# Altium PCB PCB1.PcbDoc
Units mm, origin at the board's own origin, x right, y up, seen from the top; angles counter-clockwise.
Board outline 100 x 50 mm, 2 copper layers (Top Layer, Bottom Layer); 19 components, 17 nets, 118 pads, 0 vias.
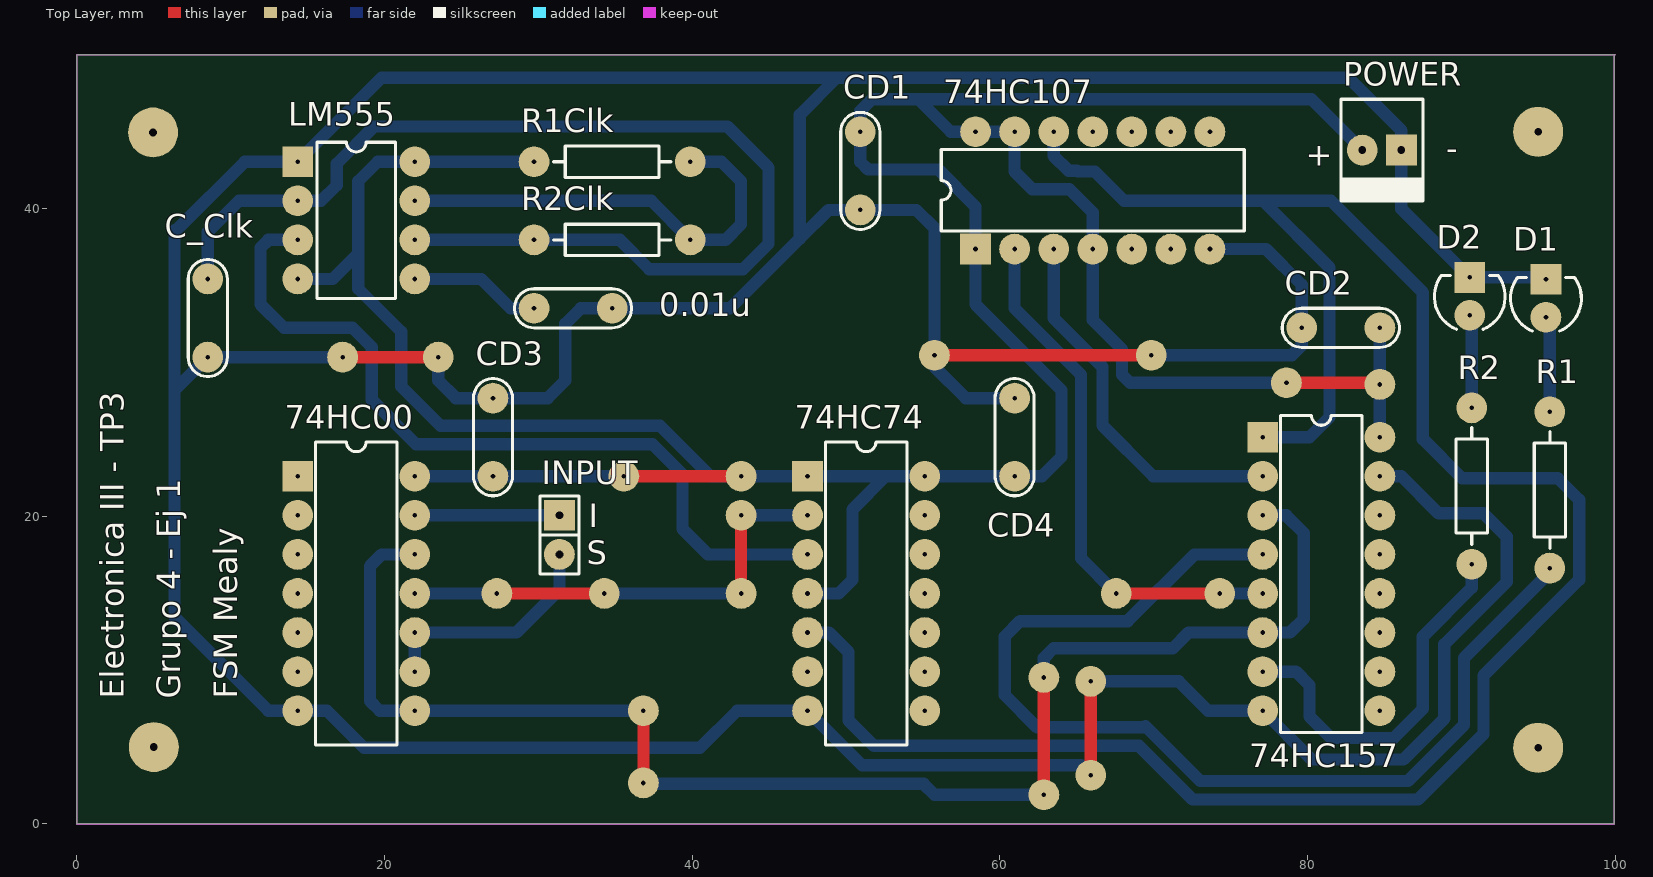
[diagram p0: Top Layer view]
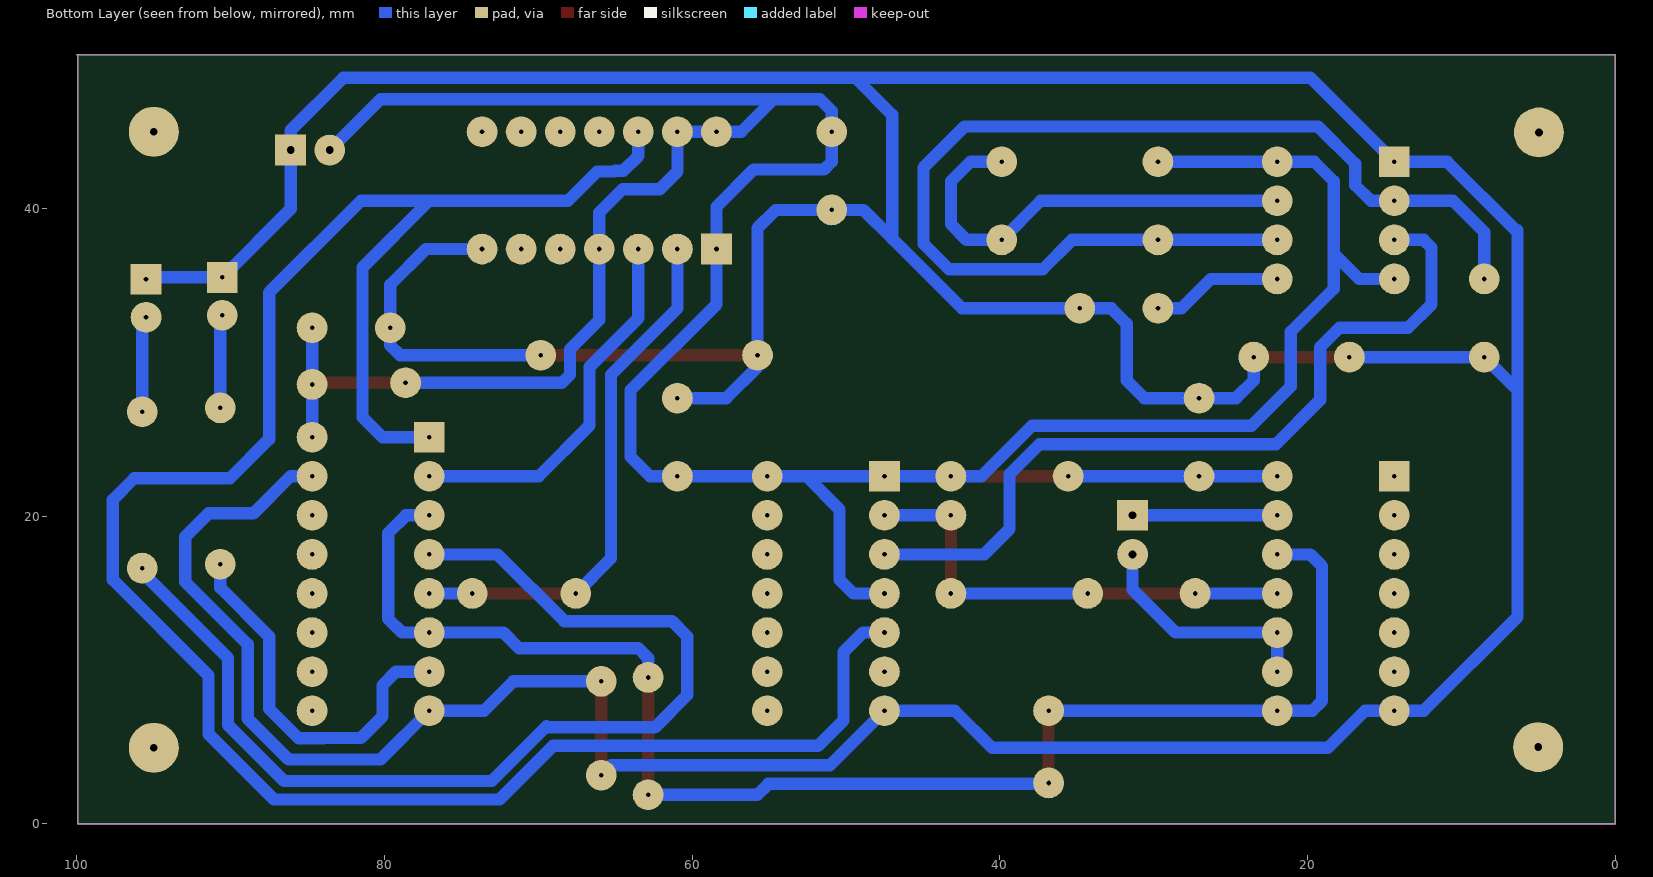
[diagram p1: Bottom Layer view, seen from below]
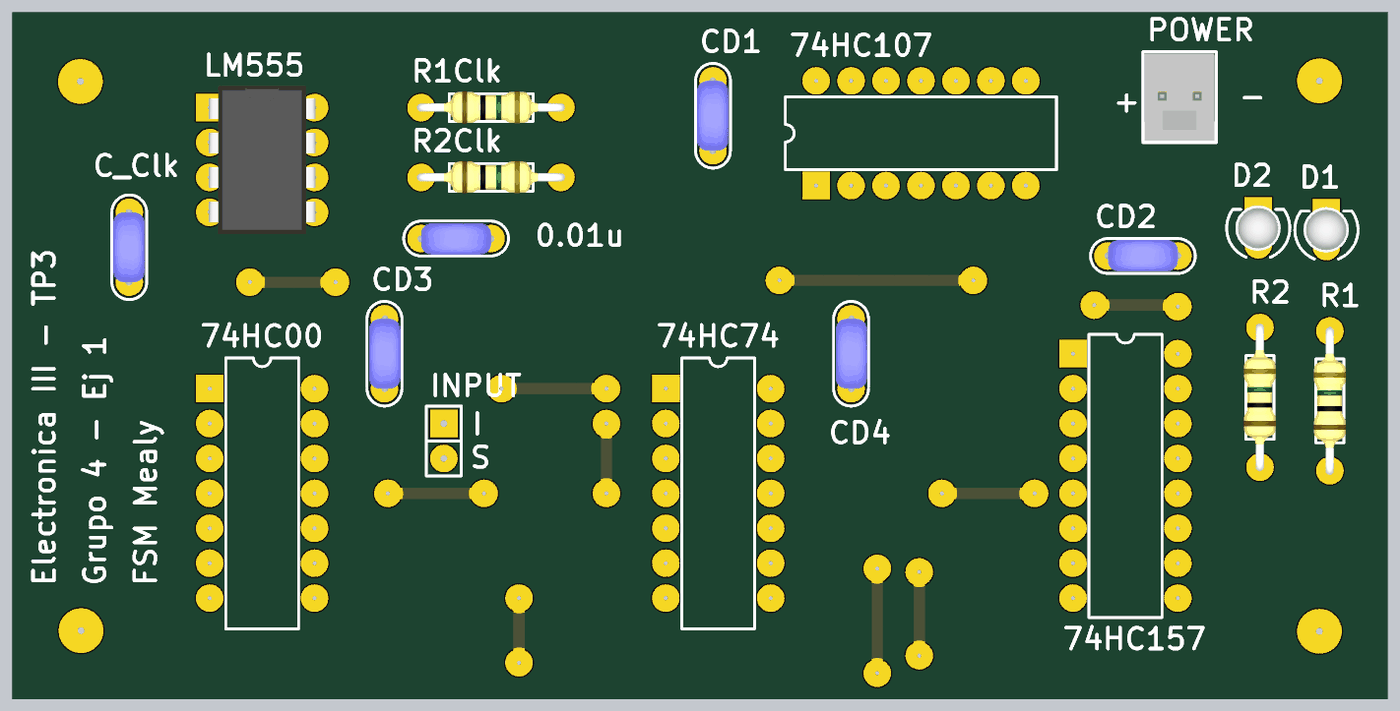
[diagram p2: 3D render of the assembled board from above, using the file's embedded part models]

## Layer stack, top to bottom
Top Solder: solder mask 0.0102, Solder Resist, Dk 3.5
Top Layer: signal copper 0.0356
Dielectric 1: dielectric 0.32, FR-4, Dk 4.8
Bottom Layer: signal copper 0.0356
Bottom Solder: solder mask 0.0102, Solder Resist, Dk 3.5

## Board outline
0,0 99.949,0 99.949,49.949 100,50 0,50

## Design rules (kind name [scope] priority, off if disabled: settings)
Clearance [All] p1: gap=0.4 ignorepadtopadclearanceinfootprint=FALSE
PolygonConnect [All] p1: connectstyle=Relief reliefconductorwidth=0.254 reliefentries=4 polygonreliefangle="90 Angle" airgapwidth=0.254
RoutingVias [All] p1: holewidth=0.3 width=2 viastyle="Through Hole" minholewidth=0.3 minwidth=1.5 maxholewidth=0.5 maxwidth=2
SolderMaskExpansion [All] p1: expansion=0.102
Width [All] p1: maxlimit=0.9 minlimit=0.6 preferedwidth=0.8
30 further rules are at their usual default settings.

## Components (designator, comment, footprint, x,y, rotation, side; value= is the part's Value field where it differs from the comment)
0.01u "CAP" CAP200 32.258,33.528 r0 top
74HC00 "SN74AHC00N" N014 18.161,14.986 r270 top
74HC74 "SN74AHCT74N" N014 51.308,14.986 r270 top
74HC107 "SN74HC107N" N014D 66.04,41.19 r0 top
74HC157 "SN54HC157J" J016 80.899,16.256 r270 top
C_Clk "CAP" CAP200 8.509,32.893 r270 top
CD1 "CAP" CAP200 50.927,42.46 r270 top
CD2 "CAP" CAP200 82.169,32.258 r180 top
CD3 "CAP" CAP200 27.051,25.146 r90 top
CD4 "CAP" CAP200 60.96,25.146 r90 top
D1 "LED" LED3 95.504,34.163 r90 top
D2 "LED" LED3 90.551,34.29 r90 top
INPUT "CON2" SIP2 31.369,18.796 r270 top
LM555 "LM555" DIP8 14.351,43.053 r0 top
POWER "MOLEX2" MOLEX2 86.106,43.815 r180 top
R1 "RES" RES400 95.758,16.637 r90 top
R1Clk "RES" RES400 29.718,43.053 r0 top
R2 "RES" RES400 90.678,16.891 r90 top
R2Clk "RES" RES400 29.718,37.973 r0 top

## Footprints (in the part's own frame and the unit in brackets; to place one, negate y for a bottom-side part, rotate by r counter-clockwise, add the part's x,y. Pads: shape width x height; smd on the part's side, far side on the other; paste and mask are expansions set on the pad)
CAP200 [mm]
  round 2 hole 0.3: 1(-2.54,0) 2(2.54,0)
  silkscreen extent -3.81,-1.27 3.81,1.27, body extent -2.79,-1.17 2.79,1.12, height 6.24
DIP8 [mm]
  rect 2x2 hole 0.3: 1(0,0)
  round 2 hole 0.3: 2(0,-2.54) 3(0,-5.08) 4(0,-7.62) 5(7.62,-7.62) 6(7.62,-5.08) 7(7.62,-2.54) 8(7.62,0)
  silkscreen extent 1.27,-8.89 6.35,1.27, body extent -0.06,-9.21 7.7,1.59, height 4.5
J016 [mm] "DIP; 16 Leads; Row Spacing 7.62 mm; Pitch 2.54 mm"
  rect 2x2 hole 0.3: 1(-8.89,-3.81)
  round 2 hole 0.3: 2(-6.35,-3.81) 3(-3.81,-3.81) 4(-1.27,-3.81) 5(1.27,-3.81) 6(3.81,-3.81) 7(6.35,-3.81) 8(8.89,-3.81) 9(8.89,3.81) 10(6.35,3.81) 11(3.81,3.81) 12(1.27,3.81) 13(-1.27,3.81) 14(-3.81,3.81) 15(-6.35,3.81) 16(-8.89,3.81)
  silkscreen extent -10.3,-2.65 10.3,2.65
LED3 [mm]
  round 2 hole 0.3: 1(-1.219,0)
  rect 2x2 hole 0.3: 2(1.245,0)
  silkscreen extent -2.13,-2.3 1.36,2.3, body extent -1.65,-1.63 1.65,1.66, height 0.49
MOLEX2 [mm]
  rect 2x2 hole 0.5: 1(0,0)
  round 2 hole 0.5: 2(2.54,0)
  silkscreen extent -1.4,-3.3 3.94,3.3, body extent -1.27,-3.17 3.81,3.18, height 10.74
N014 [mm] "DIP; 14 Leads; Row Spacing 7.62 mm; Pitch 2.54 mm"
  rect 2x2 hole 0.3: 1(-7.62,-3.81)
  round 2 hole 0.3: 2(-5.08,-3.81) 3(-2.54,-3.81) 4(0,-3.81) 5(2.54,-3.81) 6(5.08,-3.81) 7(7.62,-3.81) 8(7.62,3.81) 9(5.08,3.81) 10(2.54,3.81) 11(0,3.81) 12(-2.54,3.81) 13(-5.08,3.81) 14(-7.62,3.81)
  silkscreen extent -9.85,-2.65 9.85,2.65
N014D [mm] "DIP; 14 Leads; Row Spacing 7.62 mm; Pitch 2.54 mm"
  rect 2x2 hole 0.3: 1(-7.62,-3.81)
  round 2 hole 0.3: 2(-5.08,-3.81) 3(-2.54,-3.81) 4(0,-3.81) 5(2.54,-3.81) 6(5.08,-3.81) 7(7.62,-3.81) 8(7.62,3.81) 9(5.08,3.81) 10(2.54,3.81) 11(0,3.81) 12(-2.54,3.81) 13(-5.08,3.81) 14(-7.62,3.81)
  silkscreen extent -9.85,-2.65 9.85,2.65
RES400 [mm]
  round 2 hole 0.3: 1(0,0) 2(10.16,0)
  silkscreen extent 1.27,-1.02 8.89,1.02, body extent -0.3,-1.14 10.46,1.17, height 2.43
SIP2 [mm]
  rect 2x2 hole 0.5: 1(-1.27,0)
  round 2 hole 0.5: 2(1.27,0)
  silkscreen extent -2.54,-1.27 2.54,1.27

## Part data
74HC00: "Quadruple 2-Input Positive-NAND Gate", ComponentLink1Description="Manufacturer Link", ComponentLink1URL=http://www.ti.com/, ComponentLink2Description=Datasheet, ComponentLink2URL=http://www-s.ti.com/sc/ds/sn74ahc00.pdf, ComponentLink3Description="Packaging Specification", ComponentLink3URL=http://focus.ti.com/lit/ml/mpdi002c/mpdi002c.pdf, DatasheetVersion=Jun-1998, LatestRevisionDate=04-Mar-2005, LatestRevisionNote="Stylized 3D Model Added.", PackageDescription="DIP; 14 Leads; Row Spacing 7.62 mm; Pitch 2.54 mm", PackageReference=N014, PackageVersion=Oct-1995, Published=8-Jun-2000, Publisher="Altium Limited"
74HC74: "Dual Positive-Edge-Triggered D-Type Flip-Flop with Clear and Preset", ComponentLink1Description="Manufacturer Link", ComponentLink1URL=http://www.ti.com/, ComponentLink2Description=Datasheet, ComponentLink2URL=http://www-s.ti.com/sc/ds/sn74ahct74.pdf, DatasheetVersion=Oct-1998, LatestRevisionDate=04-Mar-2005, LatestRevisionNote="Stylized 3D Model Added.", PackageDescription="DIP; 14 Leads; Row Spacing 7.62 mm; Pitch 2.54 mm", PackageReference=N014, PackageVersion=Oct-1995, Published=8-Jun-2000, Publisher="Altium Limited"
74HC107: "Dual J-K Negative-Edge-Triggered Flip-Flop with Clear", ComponentLink1Description="Manufacturer Link", ComponentLink1URL=http://www.ti.com/, DatasheetVersion=Jun-1989, LatestRevisionDate=04-Mar-2005, LatestRevisionNote="Stylized 3D Model Added.", PackageDescription="DIP; 14 Leads; Row Spacing 7.62 mm; Pitch 2.54 mm", PackageReference=N014D, PackageVersion=Oct-1995, Published=8-Jun-2000, Publisher="Altium Limited"
74HC157: "Quadraple 2-Line to 1-Line Data Selector/Multiplexer", ComponentLink1Description="Manufacturer Link", ComponentLink1URL=http://www.ti.com/, ComponentLink2Description=Datasheet, ComponentLink2URL=http://www-s.ti.com/sc/ds/sn74hc157.pdf, DatasheetVersion=May-1997, LatestRevisionDate=04-Mar-2005, LatestRevisionNote="Stylized 3D Model Added.", PackageDescription="DIP; 16 Leads; Row Spacing 7.62 mm; Pitch 2.54 mm", PackageReference=J016, PackageVersion=Jun-1999, Published=8-Jun-2000, Publisher="Altium Limited"
LM555: "Timer"

## Free pads (board coordinates)
  round 3.25 hole 0.5: 57(5,5) 58(94.996,4.953) 59(95,45) 60(4.953,44.958)
  round 2 hole 0.3: 61(74.295,14.986) 62(67.564,14.986) 64(35.56,22.606) 65(43.18,22.606) 66(43.18,20.066) 67(27.305,14.986) 68(34.29,14.986) 69(43.18,14.986) 70(69.85,30.48) 71(55.753,30.48) 72(23.495,30.353) 73(17.272,30.353) 74(65.913,9.271) 75(65.913,3.175) 76(84.709,28.575) 77(78.635,28.68) 78(36.83,7.366) 79(36.83,2.667) 80(62.865,9.525) 82(62.865,1.905)

## Nets (pads, with @x,y where several pads share a name; then routed paths per layer and width w, separated by ;. In a path a pad name is that pad's centre, name@x,y a point inside that pad or via, vN(x,y) a via of type N, cw(c..) or ccw(c..) an arc to the next point about the centre after c; other vN are vias at no path point)
Clk: 74HC74.3 LM555.3 | length 52.7
  Bottom Layer w0.8: LM555.3 12.446,37.973 11.938,37.465 11.938,33.782 13.462,32.258 17.913,32.258 19.177,30.994 19.177,27.559 22.05,24.686 37.417,24.686 39.37,22.733 39.37,19.177 41.021,17.526 74HC74.3
GND: 0.01u.2 74HC00.7 74HC74.7 74HC107.7 74HC157.8 74HC157.15 C_Clk.2 CD1.2 CD2.2 CD3.2 CD4.2 D1.2 D2.2 LM555.1 pad.70 pad.71 pad.72 pad.73 pad.74 pad.75 POWER.1 | length 369.9
  Top Layer w0.8: pad.73 pad.72 ; pad.71 pad.70 ; pad.75 pad.74
  Bottom Layer w0.8: pad.73 C_Clk.2 6.35,28.194 ; pad.72 23.495,28.829 24.638,27.686 CD3.2 30.607,27.686 31.75,28.829 31.75,32.512 32.766,33.528 0.01u.2 42.464,33.528 46.99,38.054 ; CD4.2 57.785,27.686 55.753,29.718 pad.71 55.753,38.735 54.568,39.92 CD1.2 48.856,39.92 46.99,38.054 ; pad.75 65.278,3.81 51.054,3.81 74HC74.7 42.926,7.366 40.513,4.953 18.669,4.953 16.256,7.366 74HC00.7 12.446,7.366 6.35,13.462 6.35,28.194 ; pad.74 71.628,9.271 73.533,7.366 74HC157.8 80.264,4.191 86.233,4.191 88.9,6.858 88.9,11.684 92.964,15.748 92.964,18.669 91.44,20.193 88.519,20.193 86.106,22.606 74HC157.15 ; pad.70 78.994,30.48 79.629,31.115 CD2.2 79.629,35.052 77.301,37.38 74HC107.7 ; D1.2 95.377,35.535 D2.2 86.106,39.98 POWER.1 86.106,45.085 82.677,48.514 49.403,48.514 ; 6.35,28.194 6.35,38.608 6.477,38.608 10.922,43.053 LM555.1 19.812,48.514 49.403,48.514 ; 46.99,38.054 46.99,46.101 49.403,48.514
I: 74HC00.13 INPUT.1 | length 9.4
  Bottom Layer w0.8: 74HC00.13 INPUT.1
Net0.01u_1: 0.01u.1 LM555.5 | length 8.5
  Bottom Layer w0.8: LM555.5 26.289,35.433 28.194,33.528 0.01u.1
Net74HC00_11: 74HC00.11 74HC74.2 pad.66 pad.67 pad.68 pad.69 | length 30.6
  Top Layer w0.8: pad.67 pad.68 ; pad.69 pad.66
  Bottom Layer w0.8: 74HC00.11 pad.67 ; pad.68 pad.69 ; pad.66 74HC74.2
Net74HC107_2: 74HC107.2 74HC157.5 pad.61 pad.62 | length 34.7
  Top Layer w0.8: pad.62 pad.61
  Bottom Layer w0.8: 74HC107.2 60.96,33.528 65.278,29.21 65.278,17.272 pad.62 ; pad.61 74HC157.5
Net74HC107_3: 74HC107.3 74HC157.2 | length 24.6
  Bottom Layer w0.8: 74HC107.3 63.5,32.893 66.675,29.718 66.675,25.908 69.977,22.606 74HC157.2
Net74HC157_4: 74HC157.4 R1.1 | length 69
  Bottom Layer w0.8: 74HC157.4 72.65,17.526 68.31,13.186 61.319,13.186 60.325,12.192 60.325,8.382 62.427,6.28 69.399,6.28 69.469,6.35 73.025,2.794 86.533,2.794 90.17,6.431 90.17,10.795 95.758,16.383 R1.1
Net74HC157_7: 74HC157.7 R2.1 | length 24.9
  Bottom Layer w0.8: 74HC157.7 79.248,9.906 80.137,9.017 80.137,6.985 81.534,5.588 83.941,5.588 83.963,5.566 85.576,5.566 87.503,7.493 87.503,12.192 90.678,15.367 R2.1
NetC_Clk_1: C_Clk.1 LM555.2 LM555.6 R2Clk.1 | length 73.7
  Bottom Layer w0.8: C_Clk.1 8.509,38.481 10.541,40.513 LM555.2 15.875,40.513 16.891,41.529 16.891,42.926 19.304,45.339 42.291,45.339 44.958,42.672 44.958,37.719 43.307,36.068 37.211,36.068 35.306,37.973 R2Clk.1 LM555.6
NetD1_1: D1.1 R1.2 | length 6.3
  Bottom Layer w0.8: D1.1 95.758,32.69 R1.2
NetD2_1: D2.1 R2.2 | length 6.1
  Bottom Layer w0.8: D2.1 90.678,32.944 R2.2
NetLM555_7: LM555.7 R1Clk.2 R2Clk.2 | length 29.3
  Bottom Layer w0.8: LM555.7 37.338,40.513 R2Clk.2 42.164,37.973 43.18,38.989 43.18,41.783 41.91,43.053 R1Clk.2
nS: 74HC00.8 74HC00.12 74HC157.3 74HC157.6 pad.78 pad.79 pad.80 pad.82 | length 96.7
  Top Layer w0.8: pad.79 pad.78 ; pad.82 pad.80
  Bottom Layer w0.8: 74HC00.12 19.812,17.526 19.05,16.764 19.05,8.001 19.685,7.366 74HC00.8 pad.78 ; pad.79 36.887,2.61 55.048,2.61 55.753,1.905 pad.82 ; pad.80 62.865,10.795 63.5,11.43 71.247,11.43 72.263,12.446 74HC157.6 78.867,12.446 79.756,13.335 79.756,18.923 78.613,20.066 74HC157.3
S: 74HC00.9 74HC00.10 INPUT.2 | length 15.4
  Bottom Layer w0.8: 74HC00.9 74HC00.10 28.575,12.446 31.369,15.24 INPUT.2
VCC: 74HC00.14 74HC74.1 74HC74.4 74HC74.14 74HC107.1 74HC107.4 74HC107.13 74HC107.14 74HC157.16 CD1.1 CD2.1 CD3.1 CD4.1 LM555.4 LM555.8 pad.64 pad.65 pad.76 pad.77 POWER.2 R1Clk.1 | length 225.3
  Top Layer w0.8: pad.64 pad.65 ; pad.77 84.604,28.68 pad.76
  Bottom Layer w0.8: LM555.4 16.637,35.433 18.288,37.084 ; 74HC00.14 CD3.1 pad.64 ; R1Clk.1 LM555.8 19.558,43.053 18.288,41.783 18.288,37.084 ; 74HC74.4 49.53,14.986 50.419,15.875 50.419,20.447 52.578,22.606 ; pad.77 68.475,28.68 67.945,29.21 67.945,30.861 66.04,32.766 74HC107.4 66.04,39.751 64.516,41.275 62.103,41.275 60.96,42.418 74HC107.13 74HC107.14 56.811,45 54.694,47.117 ; POWER.2 80.264,47.117 54.694,47.117 ; 74HC157.16 pad.76 CD2.1 ; 18.288,37.084 18.288,34.798 21.082,32.004 21.082,28.448 23.644,25.886 37.914,25.886 41.194,22.606 pad.65 74HC74.1 52.578,22.606 ; 52.578,22.606 74HC74.14 CD4.1 62.738,22.606 64.008,23.876 64.008,28.194 58.42,33.782 74HC107.1 58.42,40.132 56.007,42.545 51.435,42.545 50.927,43.053 CD1.1 50.927,46.355 51.689,47.117 54.694,47.117
y: 74HC74.5 74HC107.12 74HC157.1 | length 141.9
  Bottom Layer w0.8: 74HC74.5 48.895,12.446 50.165,11.176 50.165,6.731 51.816,5.08 69.042,5.08 72.528,1.594 87.192,1.594 91.44,5.842 91.44,9.652 97.663,15.875 97.663,21.082 96.266,22.479 90.043,22.479 87.503,25.019 87.503,34.544 81.534,40.513 77.089,40.513 ; 74HC107.12 63.5,43.434 64.459,42.475 65.013,42.475 65.07,42.418 66.167,42.418 68.072,40.513 77.089,40.513 ; 74HC157.1 80.137,25.146 81.429,26.438 81.429,36.173 77.089,40.513
pads on no net: 74HC00.1 74HC00.2 74HC00.3 74HC00.4 74HC00.5 74HC00.6 74HC74.6 74HC74.8 74HC74.9 74HC74.10 74HC74.11 74HC74.12 74HC74.13 74HC107.5 74HC107.6 74HC107.8 74HC107.9 74HC107.10 74HC107.11 74HC157.9 74HC157.10 74HC157.11 74HC157.12 74HC157.13 74HC157.14

## Keep-outs
Keep-Out Layer:
  the board outline again, w0.1

## Silkscreen, mask and mechanical layers (free items; w line width, h text height)
Top Overlay:
  text "-" at 89.027,43.18 h1.52
  text "+" at 79.883,42.799 h1.52
  text "I" at 33.274,19.304 h1.52
  text "S" at 33.147,16.891 h1.52
  text "Electronica III - TP3" at 3.048,8.128 h1.52 r90
  text "Grupo 4 - Ej 1" at 6.731,8.128 h1.52 r90
  text "FSM Mealy" at 10.414,8.128 h1.52 r90